# Altium PCB KCD_BRUSH_MOTOR_LH2.PcbDoc
Units mm, origin at the board's own origin, x right, y up, seen from the top; angles counter-clockwise.
Board outline 16.2 x 14.79 mm, 2 copper layers (Top Layer, Bottom Layer); 8 components, 7 nets, 27 pads, 8 vias.
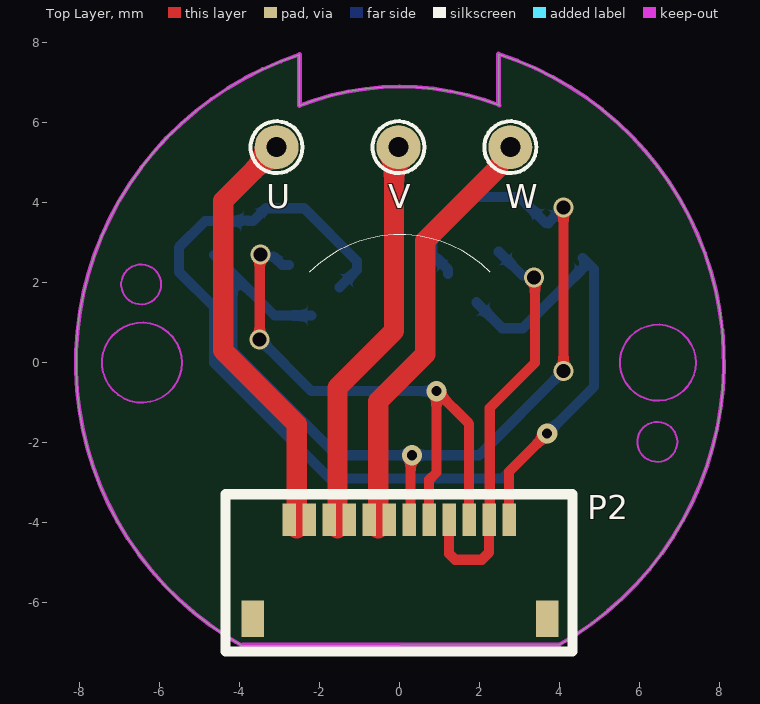
[diagram p0: Top Layer view]
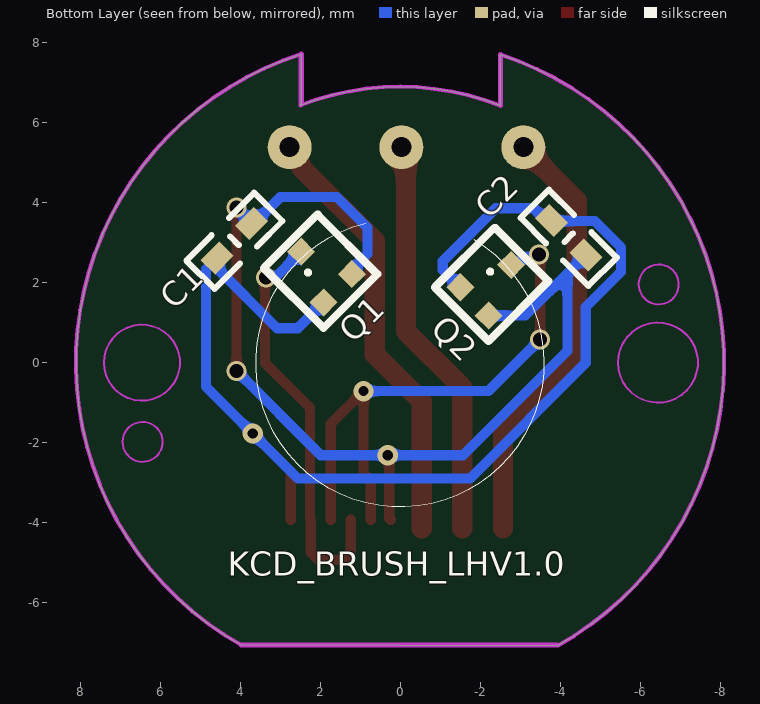
[diagram p1: Bottom Layer view, seen from below]

## Layer stack, top to bottom
Top Solder: solder mask 0.0102, Solder Resist, Dk 3.5
Top Layer: signal copper 0.0356
Dielectric 1: dielectric 0.32, FR-4, Dk 4.8
Bottom Layer: signal copper 0.0356
Bottom Solder: solder mask 0.0102, Solder Resist, Dk 3.5

## Board outline
-3.941,-7.074 cw(c0.001,0.002) -2.511,7.703 -2.511,6.429 cw(c0.001,0.002) 2.493,6.436 2.469,6.46 2.469,7.717 cw(c0.001,0.002) 3.976,-7.056

## Design rules (kind name [scope] priority, off if disabled: settings)
Clearance [All] p1: gap=0.203 ignorepadtopadclearanceinfootprint=FALSE except(0.15: Arc-SMDPad Track-SMDPad SMDPad-SMDPad)
PolygonConnect [All] p1: connectstyle=Relief reliefconductorwidth=0.254 reliefentries=4 polygonreliefangle="90 Angle" airgapwidth=0.254
RoutingVias [All] p1: holewidth=0.254 width=0.508 viastyle="Through Hole" minholewidth=0.127 minwidth=0.254 maxholewidth=0.762 maxwidth=1.27
SolderMaskExpansion [All] p1: expansion=0.102 istentingtop=FALSE
Width [All] p1: maxlimit=0.762 minlimit=0.203 preferedwidth=0.254
30 further rules are at their usual default settings.

## Components (designator, comment, footprint, x,y, rotation, side; value= is the part's Value field where it differs from the comment)
C1 "100nF/50V" "C 0402_M" 4.14,3.048 r135 bottom (schematic designator C6)
C2 "100nF/50V" "C 0402_M" -4.216,3.124 r225 bottom (schematic designator C6)
P2 "Header 12" SMD-12 2.731,-3.925 r180 top
Q1 "MT9101DT" VTDFN-6_L1.6x1.6 2.21,2.515 r135 bottom
Q2 "MT9101DT" VTDFN-6_L1.6x1.6 -2.515,2.184 r225 bottom
U "HD" HD -3.083,5.387 r90 top
V "HD" HD -0.035,5.387 r90 top
W "HD" HD 2.759,5.387 r90 top

## Footprints (in the part's own frame and the unit in brackets; to place one, negate y for a bottom-side part, rotate by r counter-clockwise, add the part's x,y. Pads: shape width x height; smd on the part's side, far side on the other; paste and mask are expansions set on the pad)
"C 0402_M" [mil] "无极性贴片电容"
  rect 26x20 smd: 1(-24,0) 2(24,0)
  silkscreen extent -47,-20 47,20, body extent -20,-10 20,10, height 21
HD [mm]
  round 1.1 hole 0.5: 1(0,0)
  silkscreen extent -0.65,-0.65 0.65,0.65
SMD-12 [mil]
  rect 22x36 smd: 0(252.38,97.5) 0/2(-37.62,97.5)
  rect 13x32 smd: 1(216.53,0) 2(196.85,0) 3(177.16,0) 4(157.48,0) 5(137.8,0) 6(118.11,0) 7(98.43,0) 8(78.74,0) 9(59.05,0) 10(39.37,0) 11(19.68,0) 12(0,0)
  silkscreen extent -62,-25 279,130
VTDFN-6_L1.6x1.6 [mm]
  rect 0.5x0.5 smd: 1(-0.5,-0.921) 2(0.5,-0.921) 3(0,0.369)
  silkscreen extent -0.95,-1.37 0.95,0.74

## Part data
C1 C2: library part C, "Capacitor"
P2: "Header, 12-Pin"

## Via types
v1: diameter 0.5, hole 0.35, Top Layer to Bottom Layer, tented both sides, 5 vias
v2: diameter 0.508, hole 0.254, Top Layer to Bottom Layer, tented both sides, 3 vias

## Nets (pads, with @x,y where several pads share a name; then routed paths per layer and width w, separated by ;. In a path a pad name is that pad's centre, name@x,y a point inside that pad or via, vN(x,y) a via of type N, cw(c..) or ccw(c..) an arc to the next point about the centre after c; other vN are vias at no path point)
3V3: C1.1 C2.1 P2.12 Q1.1 Q2.1 | length 30.9
  Top Layer w0.254: P2.12 2.731,-2.718 v2(3.68,-1.769)
  Bottom Layer w0.254: C2.1@-3.798,3.542 -3.669,3.542 -3.35,3.861 -2.395,3.861 -1.07,2.537 -1.07,2.326 Q2.1 ; C2.1 -3.965,3.555 -4.019,3.501 -4.06,3.542 -4.867,3.542 -5.525,2.885 -5.525,2.274 -4.644,1.392 -4.644,-0.005 -1.753,-2.896 2.553,-2.896 4.851,-0.598 4.851,2.337 C1.1 ; Q1.1 2.558,0.864 3.073,0.864 4.609,2.399 C1.1@4.609,2.579
GND: C1.2 C2.2 P2.7 Q1.2 Q2.2 | length 26.4
  Top Layer w0.254: P2.7 0.268,-3.888 0.268,-2.348 v2(0.305,-2.311) ; v1(4.089,-0.203) v1(4.089,3.886)
  Bottom Layer w0.254: C2.2 -4.266,2.311 ; Q2.2 -3.134,1.18 -4.266,2.311 ; v2(0.305,-2.311) -1.575,-2.311 -4.186,0.3 -4.186,2.232 -4.266,2.311 ; v2@0.33,-2.337 0.356,-2.311 1.981,-2.311 v1(4.089,-0.203) ; Q1.2 1.205,2.325 0.813,2.717 0.813,3.378 1.575,4.14 2.997,4.14 C1.2@3.645,3.492 ; C1.2 3.709,3.492 4.089,3.873 v1(4.089,3.886)
LH_0: P2.9 P2.11 Q1.3 | length 10.4
  Top Layer w0.254: P2.9 1.231,-4.776 1.38,-4.925 2.048,-4.925 2.231,-4.741 P2.11 2.246,-3.91 2.246,-1.132 3.378,0 v1@3.378,2.032
  Bottom Layer w0.254: Q1.3 3.066,2.181 3.306,2.181 v1(3.353,2.134)
LH_1: P2.8 P2.10 Q2.3 | length 14.8
  Top Layer w0.254: v1(-3.505,0.584) -3.505,2.677 v1(-3.479,2.703) ; P2.8 0.731,-2.927 0.914,-2.744 v2(0.914,-0.711) 1.731,-1.528 P2.10
  Bottom Layer w0.254: v1@-3.507,2.675 -3.487,2.656 -3.16,2.656 -2.949,2.445 Q2.3 ; v1(-3.505,0.584) -2.21,-0.711 v2(0.914,-0.711)
U: P2.1 P2.2 U.1 | length 10.8
  Top Layer w0.508: U.1 -4.42,4.051 -4.42,0.305 -2.575,-1.54 -2.575,-3.925 -2.575,-4.138
V: P2.3 P2.4 V.1 | length 10.2
  Top Layer w0.508: -1.559,-4.138 -1.559,-3.925 -1.559,-0.619 -0.148,0.791 -0.148,5.274 V.1
W: P2.5 P2.6 W.1 | length 10.9
  Top Layer w0.508: -0.543,-4.138 -0.543,-3.925 -0.543,-0.963 0.635,0.215 0.635,3.048 2.463,4.876 2.463,4.931 2.759,5.227 W.1
pads on no net: P2.0 P2.0/2

## Keep-outs
Keep-Out Layer:
  circle w0.05: c-6.449,0.002 r1
  circle w0.05: c6.451,0.002 r0.95
  circle w0.05: c6.435,-1.979 r0.5
  circle w0.05: c-6.468,1.958 r0.5
  lines w0.1: -3.941,-7.074 cw(c0.001,0.002) -2.511,7.703 ; -2.511,6.429 cw(c0.001,0.002) 2.493,6.436 ; 2.469,7.717 cw(c0.001,0.002) 3.976,-7.056
  lines w0.127: -3.923,-7.056 3.976,-7.056 ; -2.511,6.429 -2.511,7.703 ; 2.469,6.46 2.469,7.717

## Silkscreen, mask and mechanical layers (free items; w line width, h text height)
Top Overlay:
  lines w0.02: -2.262,2.262 cw(c0,0) 2.263,2.262
Bottom Overlay:
  lines w0.02: -1.844,3.083 ccw(c0.002,-0.008) 0.86,3.489
  text "KCD_BRUSH_LHV1.0" at 4.308,-5.332 h0.6